# EAGLE board block_base_S (EAGLE 9.6.2)
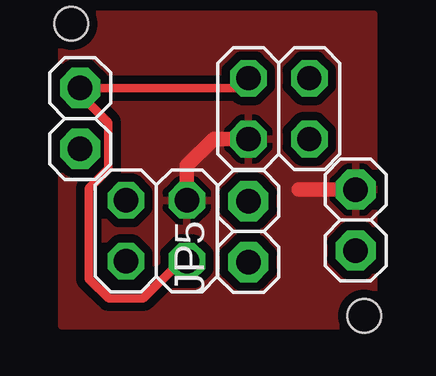
[diagram p0: board, top side]
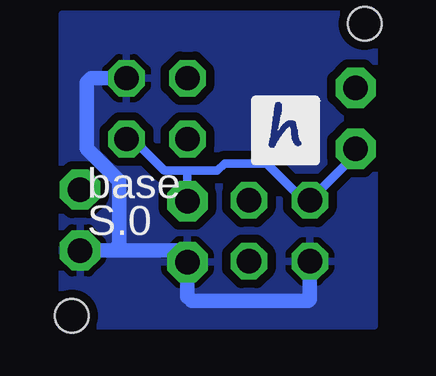
[diagram p1: board, bottom side, seen from below]

No outline drawn. Coordinates in mm, seen from the top.
Copper layers (1*16): Top 0.035mm / dielectric 1.5mm / Bottom 0.035mm
Design rules "default *": minimum track width 12mil, minimum drill 0.35mm, track to track 6mil, track to pad 6mil, pad to pad 6mil, via to via 6mil, smd to smd 6mil, copper to edge 15mil, drill to drill 30mil, minimum pad ring 10mil, minimum via ring 8mil, stop-mask expansion 4mil, vias tented up to drill 0mil, thermal gap 10mil
Holes 1.4 mm at 13.1,0.9 0.9,13.1

## Footprints (pad centres in the part's own frame; a part is rotated, then mirrored left to right if it is on the bottom)
1X02 = drill 1.016 pad 1.676 octagon: 1 -1.27,0; 2 1.27,0
2X02 = drill 1.016 octagon: 1 -1.27,-1.27; 2 -1.27,1.27; 3 1.27,-1.27; 4 1.27,1.27

## Placement (x,y rotation side)
JP1  [1X02]  1.27,9.14 270 top
JP2  [1X02]  12.75,4.9 90 top
JP3  [2X02]  9.55,9.55 0 top
JP4  [2X02]  4.45,4.46 0 top
JP5  [1X02]  8.28,4.42 90 top

## Library data of the parts
JP1-JP5 = pinhead2

## Nets
GND: JP2.1 JP3.4 JP4.1 JP5.1
SCL: JP1.2 JP3.3 JP4.2 JP5.2
SDA: JP1.1 JP3.2 JP4.3
VDD: JP2.2 JP3.1 JP4.4

## Tracks (layer width: path | path; a pad name or v marks a point on that pad's centre or on a via)
GND
  Bottom 0.61: JP3.4 12.28,10.82 12.47,10.63 12.47,7.88 11.12,6.54 11.12,3.86 11.35,3.63 | 11.35,3.63 JP2.1 | 11.35,3.63 8.76,3.63 JP5.1 8.28,1.7 8.1,1.52 3.25,1.52 3.18,1.6 JP4.1
  pour Bottom (isolate 0.356): 0.5,13.5 0.5,0.5 13.5,0.5 13.5,13.5
SCL
  Bottom 0.356: JP3.3 10.57,8.28 9.25,6.96 8.28,6.96 | 8.28,6.96 7.04,6.96 6.73,7.26 4.97,7.26 3.43,5.72 JP4.2 | JP4.2 3.41,5.95 | JP5.2 8.28,6.96 | JP4.2 1.27,7.63 JP1.2
SDA
  Top 0.356: JP4.3 5.46,3.19 3.91,1.64 2.45,1.64 1.63,2.46 1.63,6.23 2.44,7.03 2.44,8.97 1.27,10.13 JP1.1 7.87,10.41 JP3.2
VDD
  Top 0.61: JP3.1 6.83,8.28 5.72,7.17 JP4.4 5.72,5.68 | JP2.2 10.39,6.17
  pour Top (isolate 0.356): 0.5,13.5 0.5,0.5 13.5,0.5 13.5,13.5

## Text on the board
bPlace: base / S.0
bDocu: SCL | SDA | GND | 3V3